# Altium PCB PCB1.PcbDoc
Units mil, origin at the board's own origin, x right, y up, seen from the top; angles counter-clockwise.
Board outline 3185 x 1825 mil, 2 copper layers (Top Layer, Bottom Layer); 22 components, 12 nets, 56 pads, 0 vias.
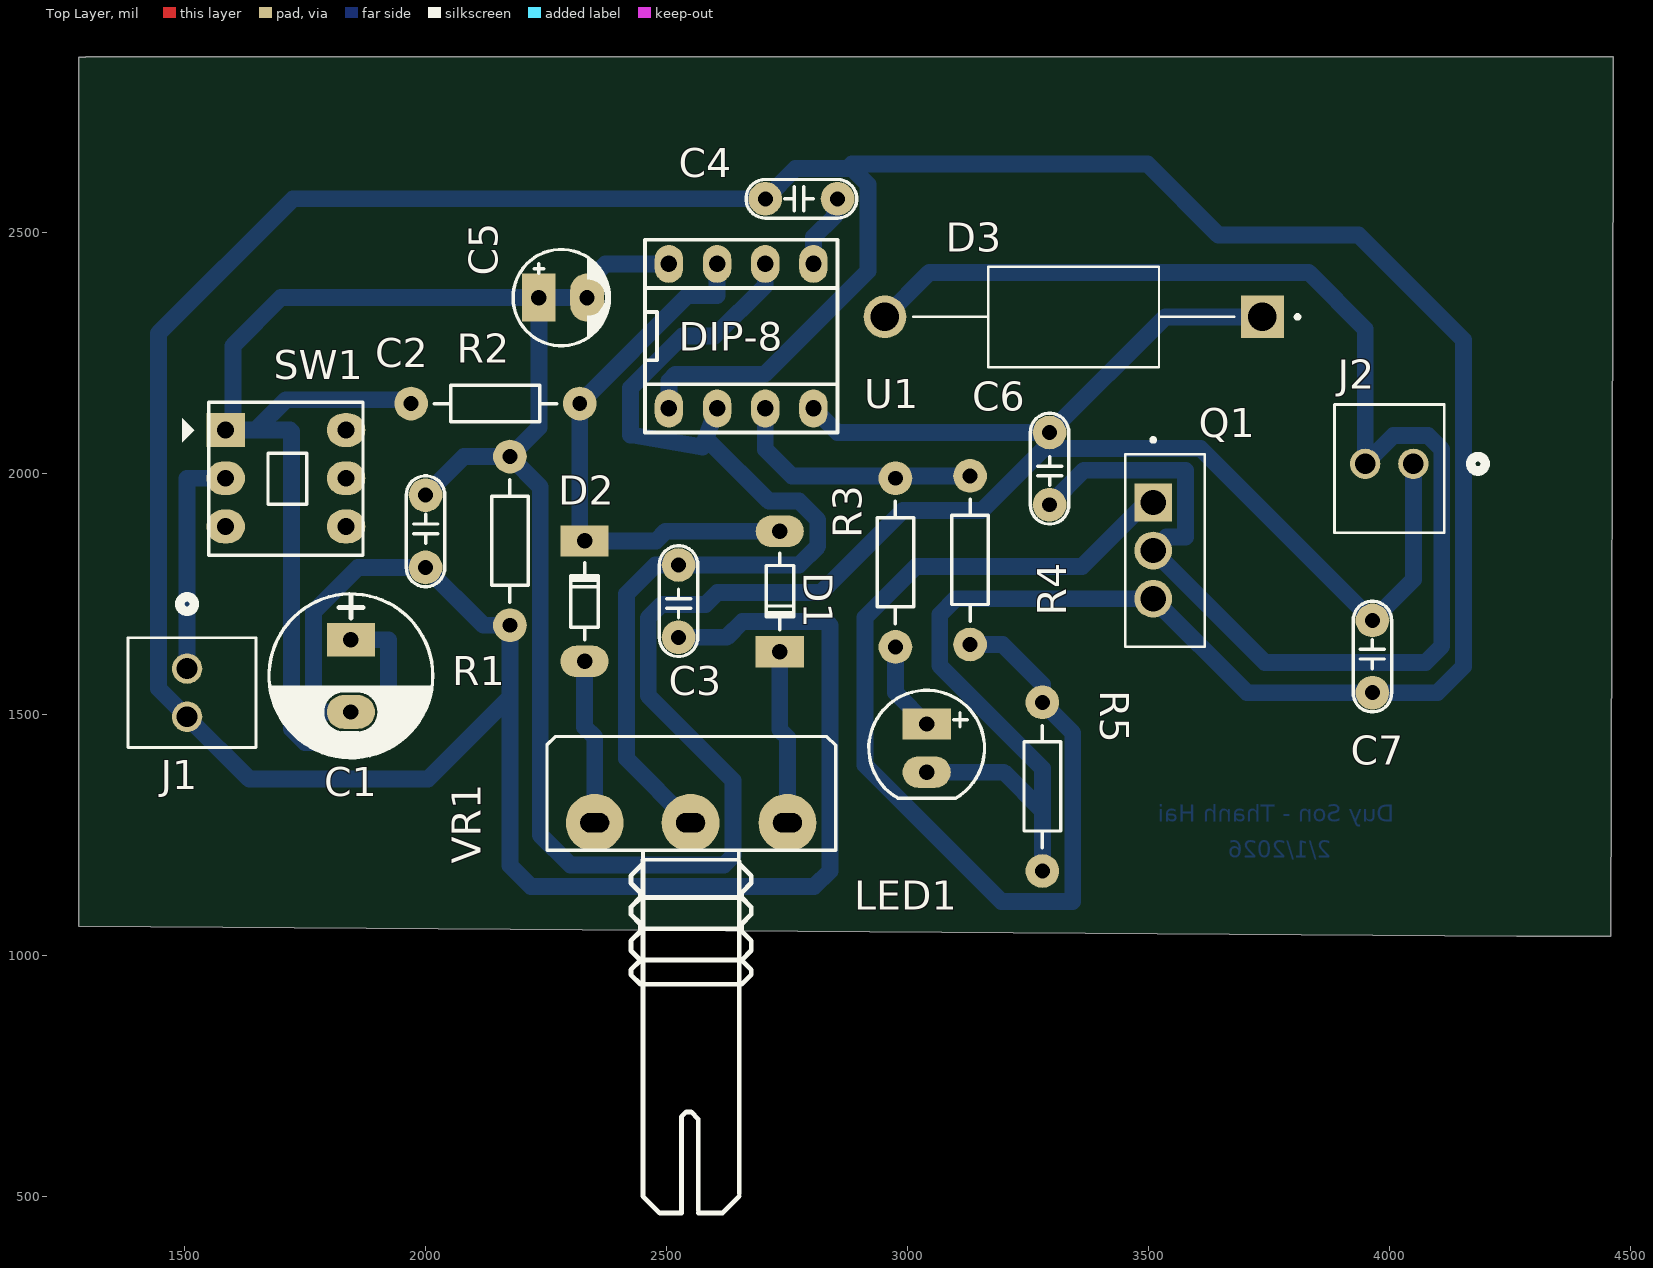
[diagram p0: Top Layer view]
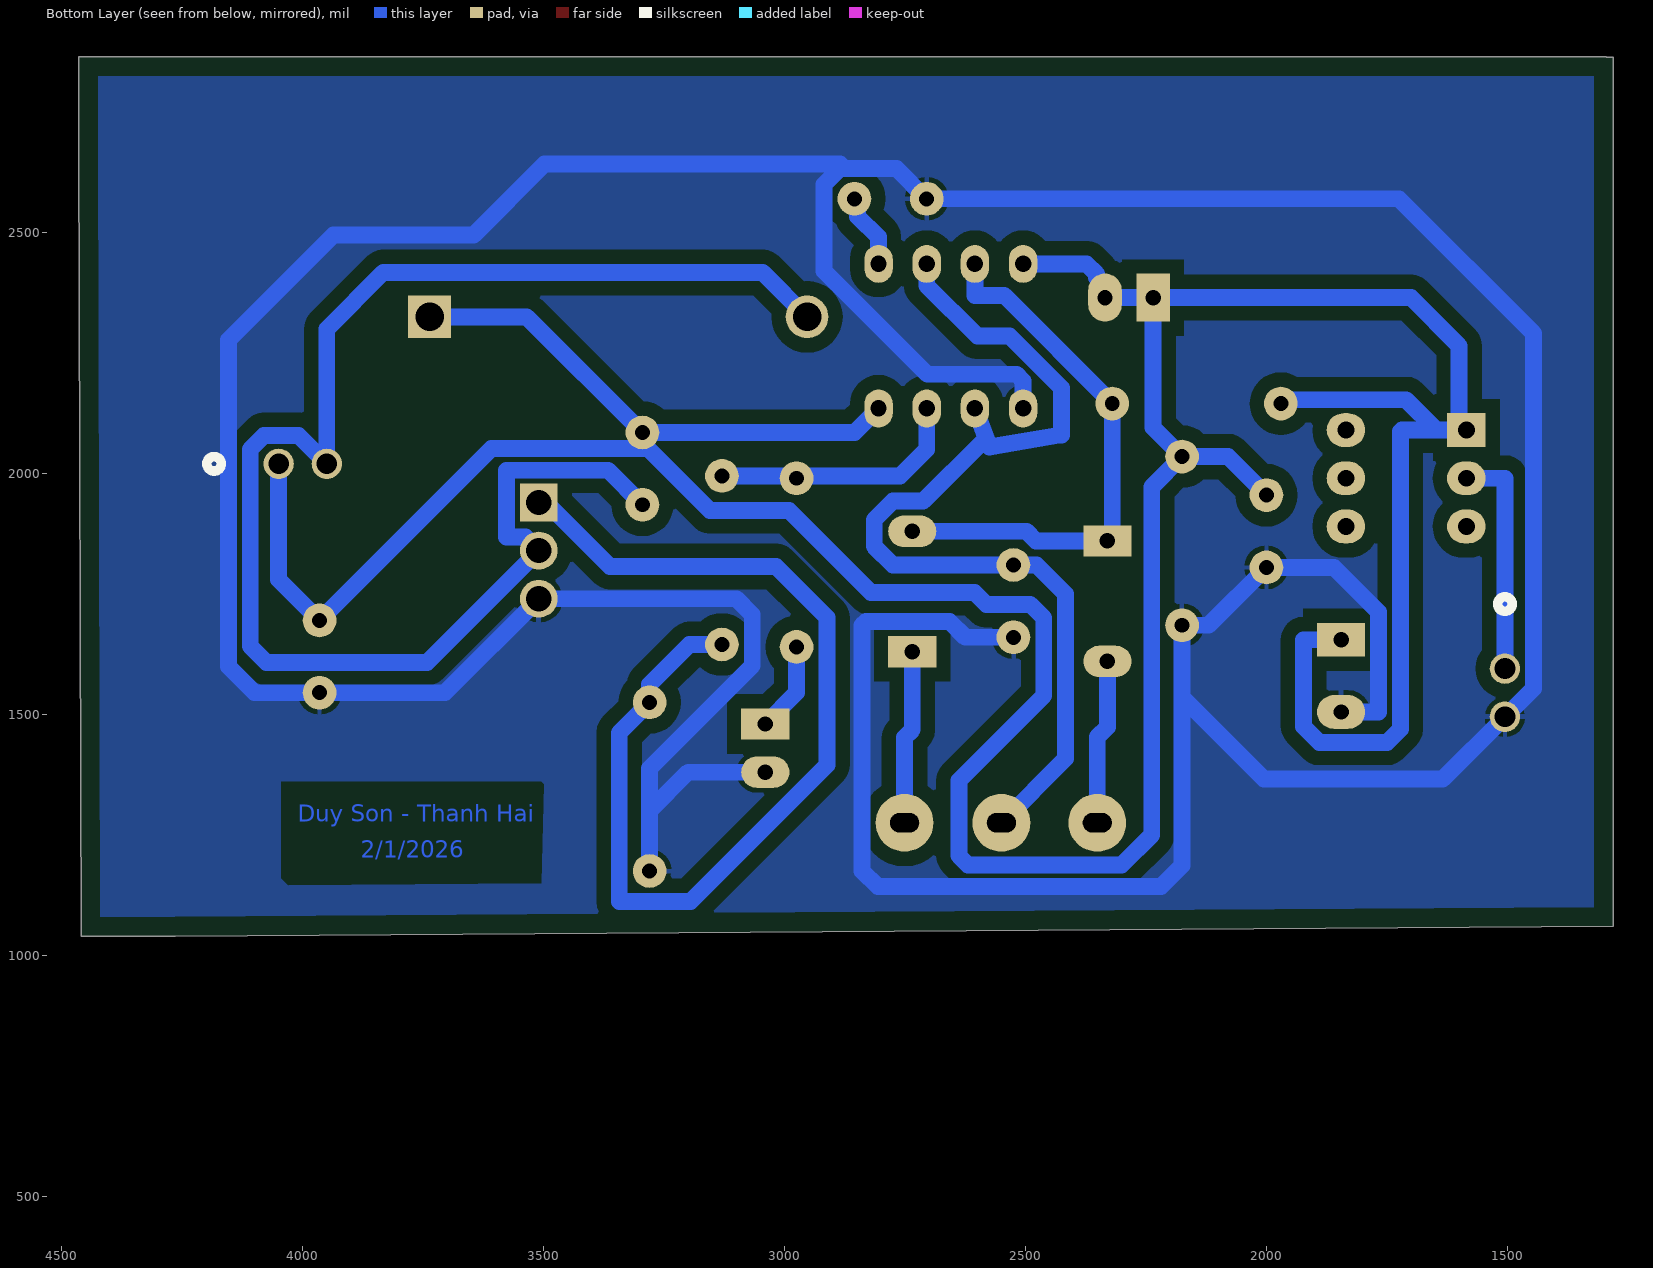
[diagram p1: Bottom Layer view, seen from below]
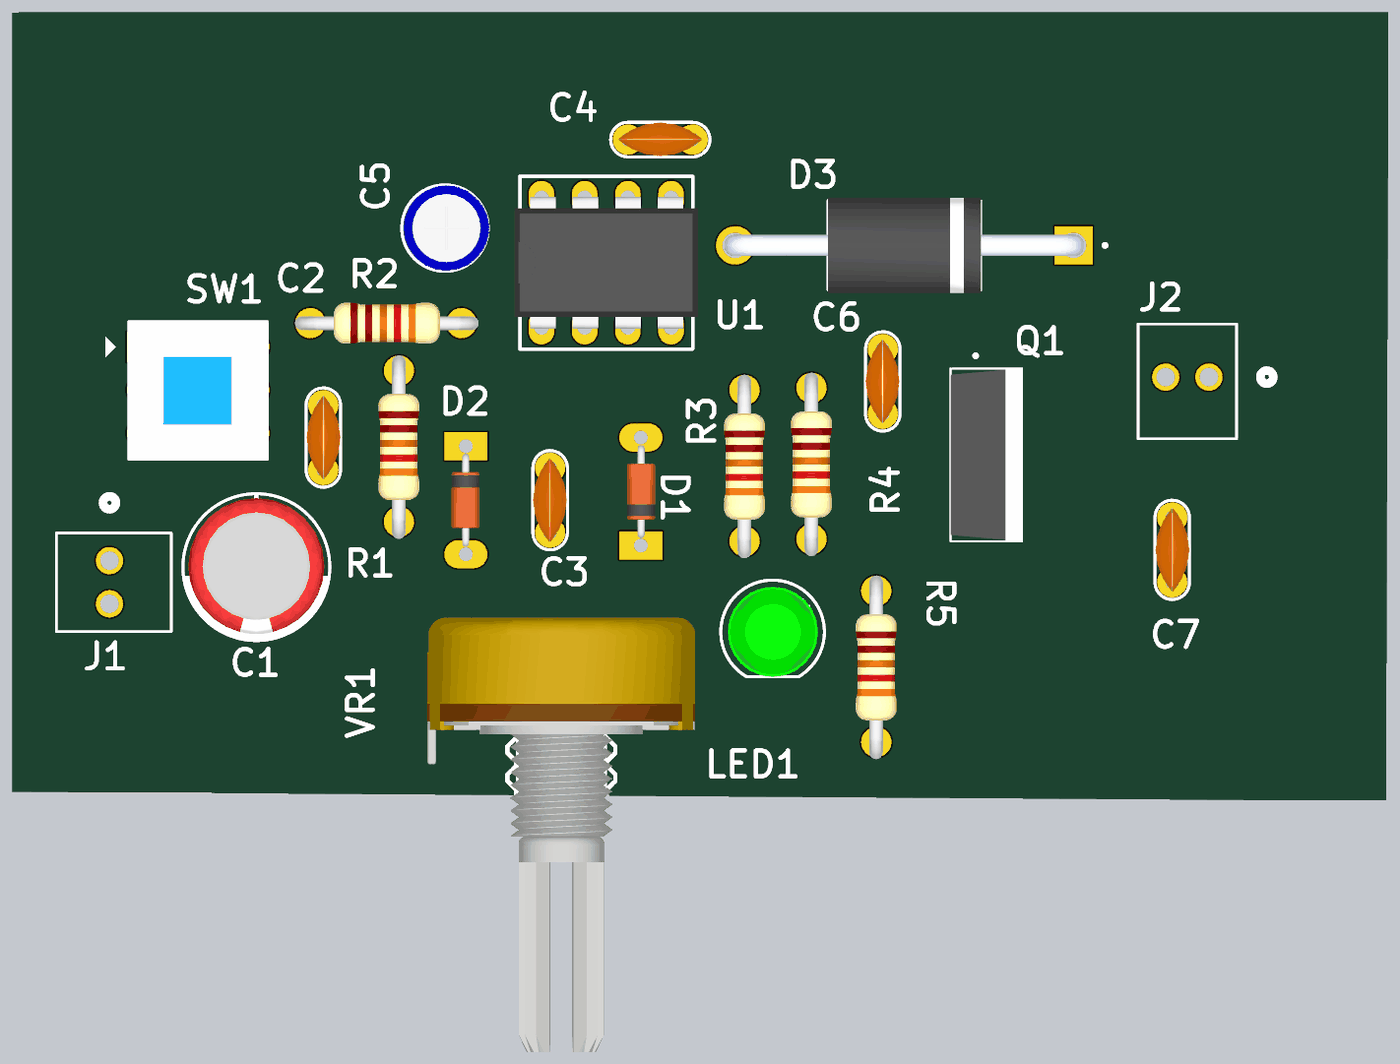
[diagram p2: 3D render of the assembled board from above, using the file's embedded part models]

## Layer stack, top to bottom
Top Solder: solder mask 0.4, Solder Resist, Dk 3.5
Top Layer: signal copper 1.4
Dielectric 1: dielectric 12.6, FR-4, Dk 4.8
Bottom Layer: signal copper 1.4
Bottom Solder: solder mask 0.4, Solder Resist, Dk 3.5

## Board outline
1280,1060 1280,2863.75 1295,2863.75 1295,2865 4465,2865 4465,2685 4460,1040 4265,1040

## Design rules (kind name [scope] priority, off if disabled: settings)
Clearance [All] p1: gap=10 ignorepadtopadclearanceinfootprint=FALSE except(0: Arc-Hole Track-Hole SMDPad-Hole THPad-Hole Via-Hole Fill-Hole Poly-Hole Region-Hole Text-Hole; 30: Arc-Fill Arc-Poly Arc-Region Track-Fill Track-Poly Track-Region SMDPad-Fill SMDPad-Poly SMDPad-Region THPad-Fill THPad-Poly THPad-Region Via-Fill Via-Poly Via-Region Fill-Fill Fill-Poly Fill-Region Poly-Poly Poly-Region Region-Region)
PolygonConnect [All] p1: connectstyle=Relief reliefconductorwidth=10 reliefentries=4 polygonreliefangle="90 Angle" airgapwidth=10
RoutingLayers [All] p1: top layer_v5=FALSE bottom layer_v5=TRUE
RoutingVias [All] p1: holewidth=28 width=50 viastyle="Through Hole" minholewidth=28 minwidth=50 maxholewidth=28 maxwidth=50
SolderMaskExpansion [All] p1: expansion=4 istentingtop=FALSE
Width [All] p1: maxlimit=50 minlimit=28 preferedwidth=35
29 further rules are at their usual default settings.

## Components (designator, comment, footprint, x,y, rotation, side; value= is the part's Value field where it differs from the comment)
C1 "3300uF" CP1.5/3.4 1845,1655 r270 top value=100uF/35V/50V
C2 "100nF" CN1.5 2000,1955 r270 top value=33pF
C3 "47nF" CN1.5 2525,1660 r90 top value=33pF
C4 "100nF" CN1.5 2705,2570 r0 top value=33pF
C5 "10uF" CP1/2 2235,2365 r0 top value=10uF/50V
C6 "100nF" CN1.5 3295,1935 r90 top value=33pF
C7 "100nF" CN1.5 3965,1695 r270 top value=33pF
D1 "1N4148" D0.5A 2735,1755 r90 top
D2 "1N4148" D0.5A 2330,1735 r270 top
D3 "KDE10A10" DIOAD1990W125L900D530 3345,2325 r180 top
J1 "397730002" CONN_39773-0002_MOL 1505,1595 r270 top
J2 "397730002" CONN_39773-0002_MOL 4050,2020 r180 top
LED1 "LED5" "LED-5 GRe" 3040,1480 r270 top
Q1 "IRF1404" TO254P1016X419X2286-3 3510,1840 r270 top
R1 "10k" R1/4W 2175,1685 r90 top value="R1/4W - 1K"
R2 "1k" R1/4W 2320,2145 r180 top value="R1/4W - 1K"
R3 "1k" R1/4W 2975,1640 r90 top value="R1/4W - 1K"
R4 "220" R1/4W 3130,1645 r90 top value="R1/4W - 1K"
R5 "10k" R1/4W 3280,1175 r90 top value="R1/4W - 1K"
SW1 "Switch 3x2" SW3-DIP 1715,1990 r0 top value="Switch 4x2"
U1 "NE555" DIP8 2655,2285 r0 top
VR1 "30k" VOL_1 2351,1275 r0 top value="VR 10K"

## Footprints (in the part's own frame and the unit in brackets; to place one, negate y for a bottom-side part, rotate by r counter-clockwise, add the part's x,y. Pads: shape width x height; smd on the part's side, far side on the other; paste and mask are expansions set on the pad)
CN1.5 [mil]
  round 70 hole 31: 1(0,0) 2(150,0)
  silkscreen extent -40,-40 190,40, body extent -22,-39 172,40, height 254
CONN_39773-0002_MOL [mil]
  round 63 hole 43: 1(0,0) 2(100,0)
  silkscreen extent -149,-123 164,143
CP1.5/3.4 [mil] "Tu hoa 220->470uF,16V, 470uF/16V,25V"
  rect 70x100 hole 32: 1(0,0)
  oval 70x100 hole 32: 2(150,0)
  silkscreen extent -95,-170 245,170, body extent -85,-157 230,157, height 446
CP1/2 [mil] "Tu hoa < 22uF/16>50V"
  rect 70x100 hole 32: 1(0,0)
  oval 70x100 hole 32: 2(100,0)
  silkscreen extent -53,-100 147,100, body extent -49,-99 149,99, height 287
D0.5A [mil] "Diode muoi, W 80mil, L 300mil"
  oval 65x100 hole 32: 1(125,0)
  rect 65x100 hole 32: 2(-125,0)
  silkscreen extent -80,-30 80,28, body extent -108,-33 108,32, height 61
DIOAD1990W125L900D530 [mm]
  round 2.25 hole 1.5: A(9.95,0)
  rect 2.25x2.25 / inner round 2.25 / far side rect 2.25x2.25 hole 1.5: C(-9.95,0)
  silkscreen extent -11.9,-2.65 8.47,2.65, body extent -10.58,-2.8 10.58,2.8, height 5.6
DIP8 [mm] "W.300/L.400"
  oval 1.5x2 hole 0.864: 1(-3.81,-3.81) 2(-1.27,-3.81) 3(1.27,-3.81) 4(3.81,-3.81) 5(3.81,3.81) 6(1.27,3.81) 7(-1.27,3.81) 8(-3.81,3.81)
  silkscreen extent -5.08,-5.08 5.08,5.08, body extent -5.4,-3.88 5.4,3.88, height 4.5
"LED-5 GRe" [mil] "LED 2 PIN, 5 ly , Only colour,pin to pin 100mil"
  rect 65x100 hole 32: 1(0,0)
  oval 65x100 hole 32: 2(100,0)
  silkscreen extent -70,-120 154,120, body extent -54,-104 154,105, height 337
R1/4W [mil] "R 1/4W, 2 Pin, 350mil"
  round 70 hole 31: 1(0,0) 2(350,0)
  silkscreen extent 48,-38 302,38, body extent -40,-47 386,47, height 111
SW3-DIP [mil] "SW DTDP - 6Pin 260x300x300 mil"
  rect 80x70 hole 35: 1(-130,100)
  oval 80x70 hole 35: 2(-130,0) 3(-130,-100) 4(120,-100) 5(120,0) 6(120,100)
  silkscreen extent -220,-160 155,158, body extent -163,-159 151,155, height 532
TO254P1016X419X2286-3 [mm]
  rect 1.995x1.995 / inner round 1.995 / far side rect 1.995x1.995 hole 1.33: 1(-2.54,0)
  round 1.995 hole 1.33: 2(0,0) 3(2.54,0)
  silkscreen extent -5.93,-1.48 5.08,2.72, body extent -5.08,-1.47 5.08,2.72, height 22.86
VOL_1 [mil]
  round 120 hole 40 slot 60 at 0 deg: 1(0,0) 2(199,0) 3(400,0)
  silkscreen extent -99,-810 500,179, body extent -110,-818 510,188, height 840

## Part data
C1: library part CP3, "Cap 100uF/35V - 470uF/16V", Description 1="1000uF/6,3V - 470uF/16V - 330uF - 25V", Description 2="220uF/35V - 100uF/50V - 63V - 4,7uF/200V", Description 3="22uF => 33uF100V - 3,3uF => 4,7uF/250V", Description 4="2,2uF =>3,3uF/350 - 2,2uF/400V - 1uF/450V"
C2 C3 C4 C6 C7: library part CN
C5: library part CP1, "Cap P  0,1uF < 22uF , 16 - 50V", Description 1="10 => 220uF/6,3V/10V - 10uF => 100uF/16V", Description 2="0,1uF => 33uF/50V - 10uF => 22uF/63V", Description 3="0,47uF => 10uF/100V"
D1 D2: library part D0.5A, "D0.5A"
D3: library part SR320, "3A, 200V, Schottky Rectifier", Package="DO-201AD Taiwan Semiconductor", Check_prices=https://www.snapeda.com/parts/SR320/Taiwan+Semiconductor/view-part/?ref=eda, MF="Taiwan Semiconductor", MP=SR320, SnapEDA_Link=https://www.snapeda.com/parts/SR320/Taiwan+Semiconductor/view-part/?ref=snap
J1 J2: "2 Position Wire to Board Terminal Block Horizontal with Board 0.100 (2.54mm) Through Hole", Package=None, Check_prices=https://www.snapeda.com/parts/397730002/Molex/view-part/?ref=eda, MF=Molex, MP=397730002, SnapEDA_Link=https://www.snapeda.com/parts/397730002/Molex/view-part/?ref=snap
LED1: library part "LED 5mm", "LED 5mm"
Q1: library part IRFZ44N, "N-Channel 55 V 49A (Tc) 94W (Tc) Through Hole TO-220AB", Package="TO-220-3 Infineon", Availability="In Stock", Check_prices=https://www.snapeda.com/parts/IRFZ44N/Infineon+Technologies/view-part/?ref=eda, MF="Infineon Technologies", MP=IRFZ44N, Price=None, Purchase-URL=https://pricing.snapeda.com/search/part/IRFZ44N/?ref=eda, SnapEDA_Link=https://www.snapeda.com/parts/IRFZ44N/Infineon+Technologies/view-part/?ref=snap
R1 R2 R3 R4 R5: library part R1/4W, "Resistor 1/4W"
SW1: library part SW3x2
U1: "TIMER IC", Current=200mA, Frequency=500kHz, Manufacturer=STMicroelectronics, Manufacturer Part Number=NE555DT, Operating Temperature="0°C ~ 70°C", Package / Case="8-SOIC (3.9mm Width)", Supplier Part Number=497-1962-2-ND, Voltage - Supply="4.5 V ~ 16 V", Category="Integrated Circuits (ICs)", Count=-, Packaging="Tape & Reel (TR)", RoHS="RoHS Compliant", Supplier=Digi-Key, Supplier 1=Digi-Key, Supplier Part Number 1=497-1962-2-ND, Type="555 Type, Timer/Oscillator (Single)"
VR1: library part "Var Resitor", "Var Resistor"

## Nets (pads, with @x,y where several pads share a name; then routed paths per layer and width w, separated by ;. In a path a pad name is that pad's centre, name@x,y a point inside that pad or via, vN(x,y) a via of type N, cw(c..) or ccw(c..) an arc to the next point about the centre after c; other vN are vias at no path point)
GND: C1.2 C2.2 C3.1 C4.1 C7.2 J1.2 LED1.2 Q1.3 R1.1 R5.1 U1.1 | length 10997.3
  Bottom Layer w35: C1.2 1767.5,1505 1767.5,1712.5 1860,1805 C2.2 2120,1685 R1.1 2175,1536 ; U1.1 2505,2192 2519,2206 2704,2206 2918,2420 2918,2600 2885,2633 2768,2633 C4.1 1725,2570 1446,2291 1446,1554 J1.2 1634,1366 2005,1366 2175,1536 ; C3.1 2625,1660 2658,1693 2831,1693 2839,1685 2839,1175 2806.5,1142.5 2218.5,1142.5 2175,1186 2175,1536 ; 2885,2642 3498,2642 3645,2495 3936,2495 4154,2277 4154,1599 4100,1545 C7.2 3705,1545 Q1.3 3100,1740 3067.15,1707.15 3067.15,1600.85 3280,1388 3280,1300 ; LED1.2 3200,1380 3280,1300 ; R5.1 3280,1300
NetC1_1: C1.1 C2.1 C5.1 C5.2 C6.2 C7.1 D3.C J2.1 R1.2 R2.2 SW1.1 U1.4 U1.8 | length 8383.3
  Bottom Layer w35: C1.1 1923,1655 1923,1475 1890,1442 1750,1442 1722,1470 1722,2087 1719,2090 1647,2090 ; R2.2 1962,2153 1710,2153 1647,2090 ; C2.1 2080,2035 R1.2 ; U1.8 2373,2435 2352.5,2414.5 2352.5,2406.97 2335,2389.47 C5.2 C5.1 ; U1.4 2855,2085 C6.2 ; D3.C 3535,2325 C6.2 ; J2.1 4050,1780 C7.1 3608.23,2051.77 C6.2@3295,2051.77 ; 1647,2090 1600,2090 SW1.1 1600,2105 1600,2265 1700,2365 C5.1 ; R1.2 2238,1972 2238,1250 2300.5,1187.5 2619,1187.5 2638,1206.5 2638,1363 2462,1539 2462,1700 2490,1728 2581,1728 2606,1753 2821,1753 2991,1923 3155,1923 3283.77,2051.77 C6.2@3295,2051.77 ; R1.2 2235,2095 C5.1 ; C6.2@3295,2051.77 C6.2
NetC3_2: C3.2 U1.2 U1.6 VR1.2 | length 2082.6
  Bottom Layer w35: VR1.2 2417,1408 2417,1750 2477,1810 C3.2 2775,1810 2814,1849 2814,1903.75 2775,1942.75 2712.25,1942.75 2587.5,2067.5 2575,2055 ; U1.2 2575,2055 ; U1.6 2705,2390 2600,2285 2533,2285 2425,2177 2425,2080 2575,2055
NetC4_2: C4.2 U1.5 | length 155.7
  Bottom Layer w35: U1.5 2805.42,2435.42 2805.42,2490.42 2848.3,2533.3 2848.3,2563.3 C4.2
NetC6_1: C6.1 D3.A J2.2 Q1.2 | length 3204.6
  Bottom Layer w35: D3.A 3045.27,2417 3833,2417 3950,2300 J2.2 4009,2079 4080,2079 4109,2050 4109,1642 4075,1608 3742,1608 Q1.2 3538,1868 3576.77,1868 3576.77,2006.77 3366.77,2006.77 C6.1
NetD1_1: D1.1 D2.2 R2.1 U1.7 | length 1152.1
  Bottom Layer w35: U1.7 2605,2369 2544,2369 R2.1 2320,1860 D2.2 2478,1860 2498,1880 D1.1
NetD1_2: D1.2 VR1.3 | length 361.6
  Bottom Layer w35: D1.2 2735,1468 2751,1452 VR1.3
NetD2_1: D2.1 VR1.1 | length 343.7
  Bottom Layer w35: D2.1 2330,1474 2351,1453 VR1.1
NetJ1_1: J1.1 SW1.2 | length 475
  Bottom Layer w35: J1.1 1505,1990 SW1.2
NetLED1_1: LED1.1 R3.1 | length 186.9
  Bottom Layer w35: R3.1 2975,1545 LED1.1
NetQ1_1: Q1.1 R4.1 R5.2 | length 2211.7
  Bottom Layer w35: R4.1 3197.04,1645 3280,1562.04 R5.2 3343,1462 3343,1112 3195,1112 2912,1395 2912,1701 3018,1807 3362,1807 3495,1940 Q1.1
NetR3_2: R3.2 R4.2 U1.3 | length 539.9
  Bottom Layer w35: U1.3 2705,2050 2760,1995 R3.2@2980,1995 ; R3.2 R3.2@2980,1995 ; R4.2 R3.2@2980,1995
pads on no net: SW1.3 SW1.4 SW1.5 SW1.6

## Polygon pours and split planes (outlines as drawn)
GND on Bottom Layer "GND_L02_P000" (solid, remove dead copper, pour order 0): 1280,2865 4465,2865 4465,1040 4440,1065 1280,1065

## Other copper
Bottom Layer:
  pour cut-out: 3500,1355 3505,1360 4045,1360 4045,1160 4030,1145 3505,1150
  text "Duy Son - Thanh Hai" at 4010,1266.27 h60
  text "2/1/2026" at 3880.06,1190.67 h60

## Text inside footprints (layer, text, board x,y; h text height)
U1: Top Overlay "DIP-8" at 2525,2255 h59.05